# Altium PCB PCB1.PcbDoc
Units mm, origin at the board's own origin, x right, y up, seen from the top; angles counter-clockwise.
Board outline 98.3 x 83.95 mm, 2 copper layers (Top Layer, Bottom Layer); 52 components, 76 nets, 209 pads, 0 vias.
Unrouted connection lines stored in the file: 109.
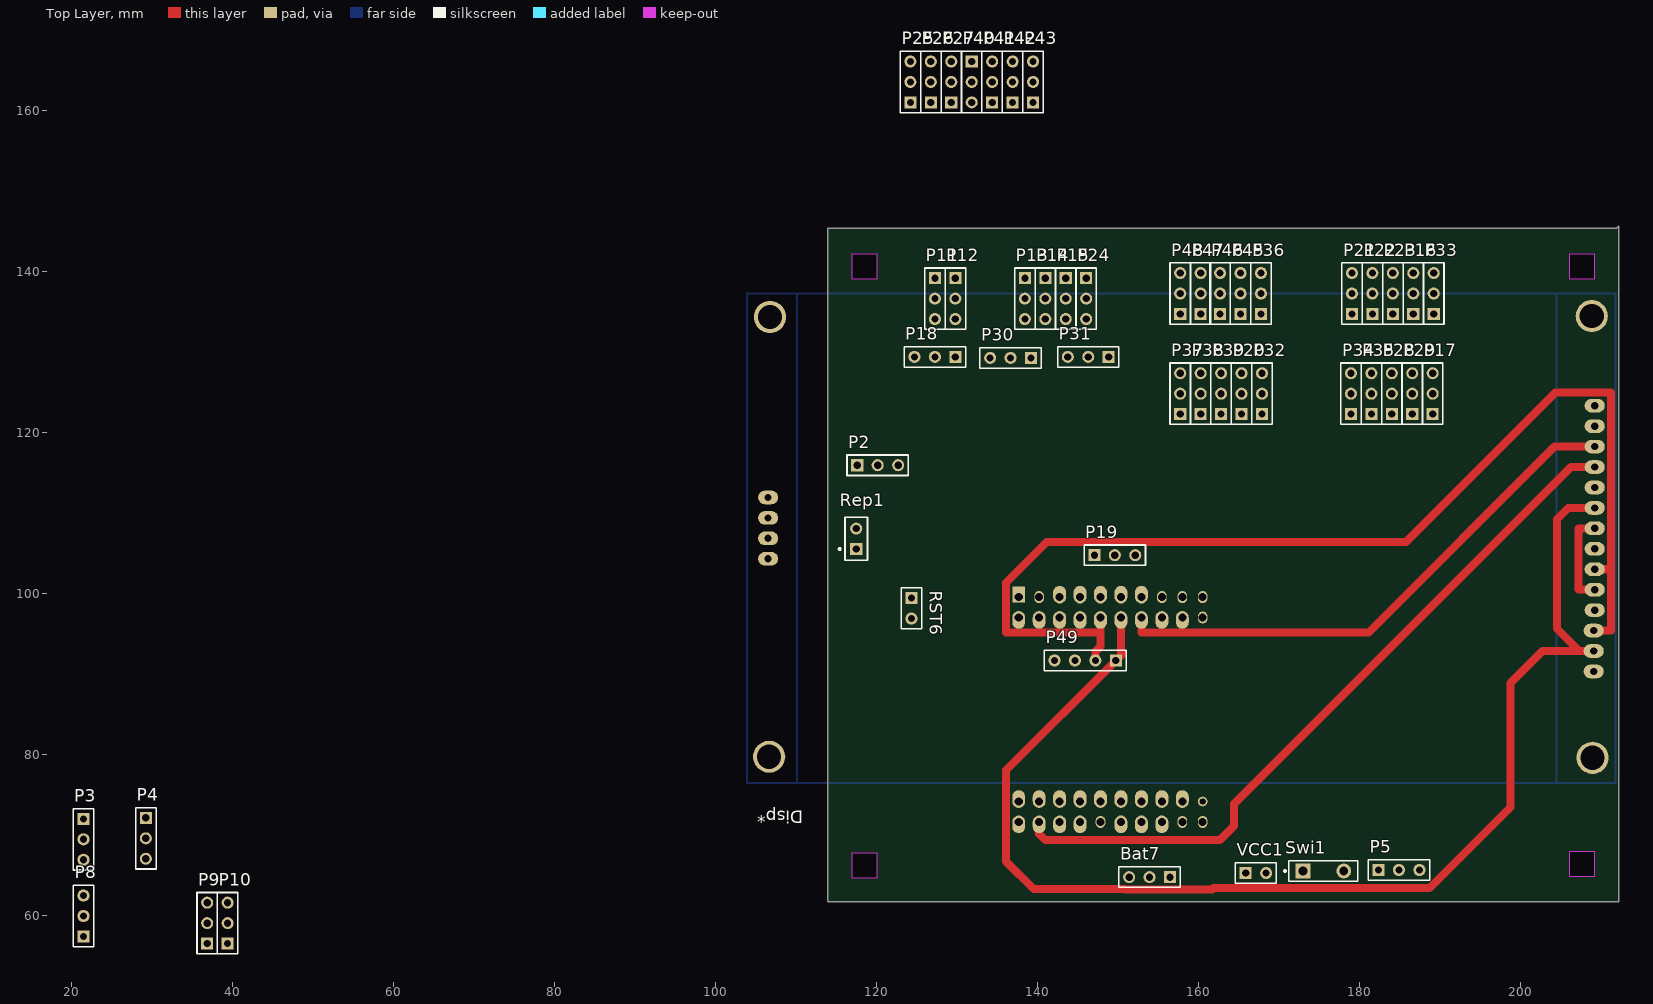
[diagram p0: Top Layer view]
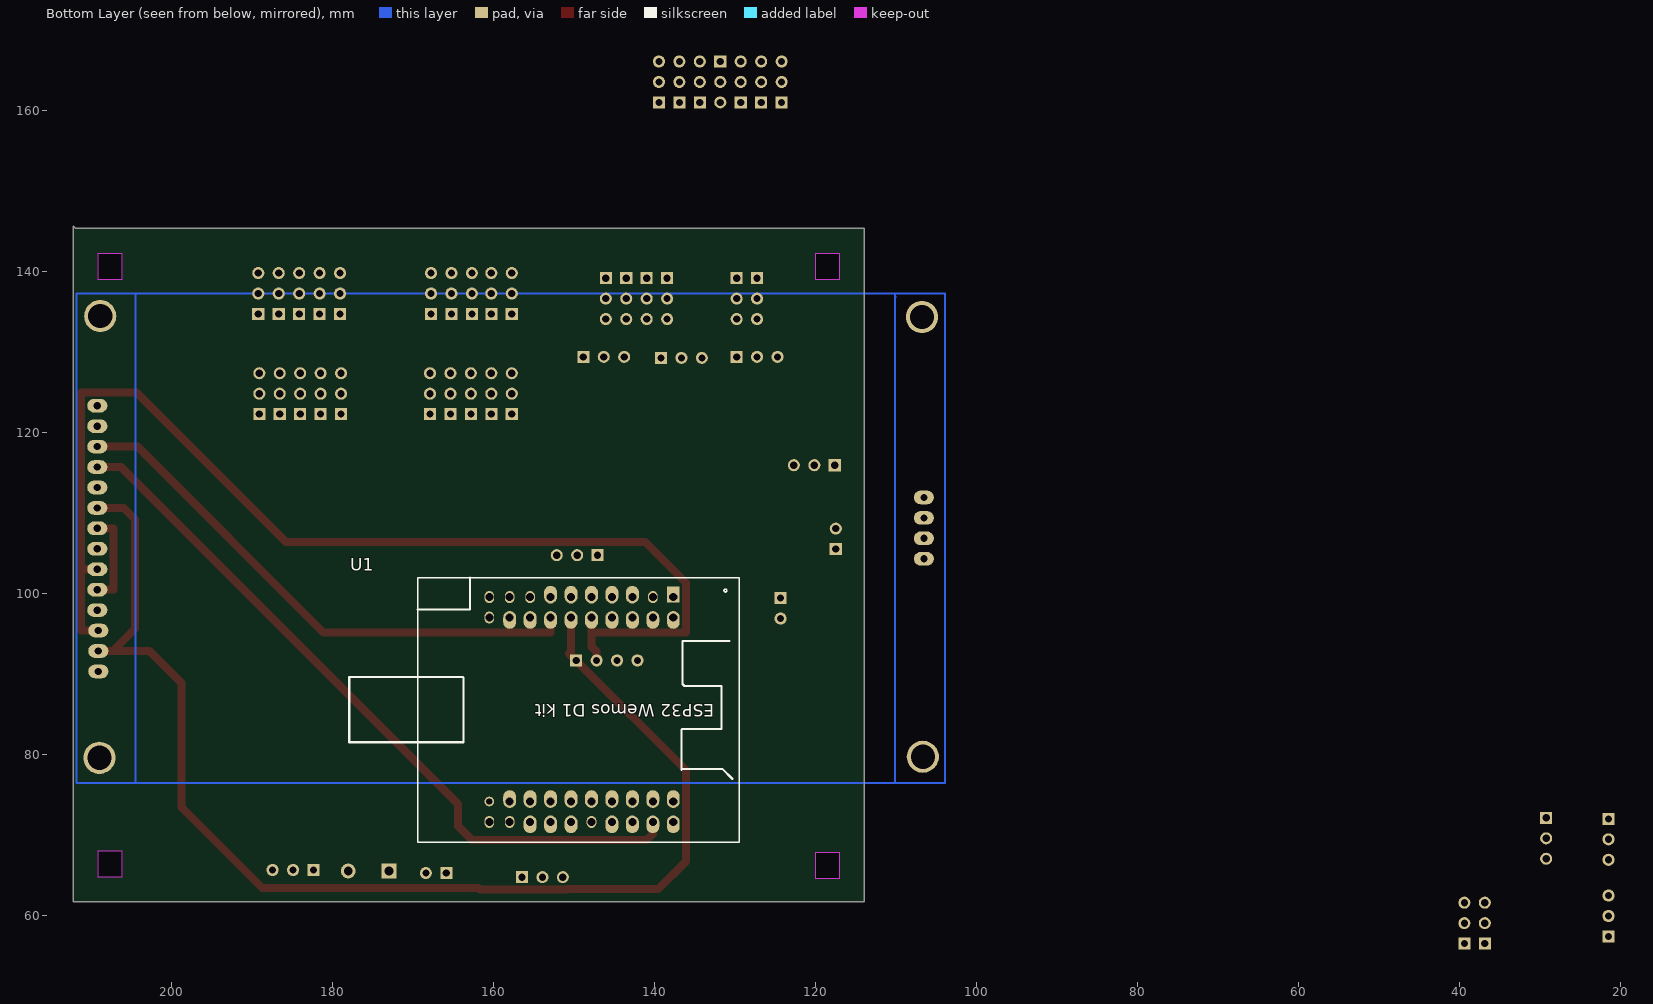
[diagram p1: Bottom Layer view, seen from below]

## Layer stack, top to bottom
Top Layer: signal copper 0.0356
Dielectric: dielectric 0.32, FR-4, Dk 4.8
Bottom Layer: signal copper 0.0356

## Board outline
113.919,61.722 113.919,145.415 211.963,145.415 212.217,145.669 212.217,61.722 113.919,61.722
cut-out: 206.121,64.834 206.121,68.008 209.169,68.008 209.169,64.834
cut-out: 206.121,139.065 206.121,142.24 209.169,142.24 209.169,139.065
cut-out: 116.967,139.065 116.967,142.24 120.015,142.24 120.015,139.065
cut-out: 119.761,-7.747 119.761,-4.572 122.809,-4.572 122.809,-7.747
cut-out: 116.967,-8.255 116.967,-5.08 120.015,-5.08 120.015,-8.255
cut-out: 116.967,64.643 116.967,67.818 120.015,67.818 120.015,64.643

## Design rules (kind name [scope] priority, off if disabled: settings)
Clearance [All] p1: gap=0.254
PolygonConnect [All] p1: connectstyle=Relief reliefconductorwidth=0.254 reliefentries=4 polygonreliefangle="90 Angle" airgapwidth=0.254
RoutingLayers [All] p1: top layer_v5=TRUE bottom layer_v5=FALSE
RoutingVias [All] p1: holewidth=0.9 width=2 viastyle="Through Hole" minholewidth=0.9 minwidth=2 maxholewidth=0.9 maxwidth=2
SolderMaskExpansion [All] p1: expansion=0.254
Width [All] p1: maxlimit=2 minlimit=0.5 preferedwidth=1
27 further rules are at their usual default settings.

## Components (designator, comment, footprint, x,y, rotation, side; value= is the part's Value field where it differs from the comment)
Bat7 "BatteryI" HDR1X3 156.464,64.77 r180 top
Disp* "LCD_TFT" "TCT_SPI_480x320 ST7796" 103.759,76.327 r0 top
P2 "Header 3" HDR1X3 117.602,115.951 r0 top
P3 "Header 3" HDR1X3 21.463,72.009 r270 top
P4 "Header 3" HDR1X3 29.21,72.136 r270 top
P5 "Header 3" HDR1X3 182.372,65.659 r0 top
P8 "Header 3" HDR1X3 21.463,57.404 r90 top
P9 "Header 3" HDR1X3 36.83,56.515 r90 top
P10 "Header 3" HDR1X3 39.37,56.515 r90 top
P11 "Header 3" HDR1X3 127.254,139.192 r270 top
P12 "Header 3" HDR1X3 129.794,139.192 r270 top
P13 "Header 3" HDR1X3 138.43,139.192 r270 top
P14 "Header 3" HDR1X3 140.97,139.192 r270 top
P15 "Header 3" HDR1X3 143.51,139.192 r270 top
P16 "Header 3" HDR1X3 186.69,134.747 r90 top
P17 "Header 3" HDR1X3 189.103,122.301 r90 top
P18 "Header 3" HDR1X3 129.794,129.413 r180 top
P19 "Header 3" HDR1X3 147.066,104.775 r0 top
P20 "Header 3" HDR1X3 165.354,122.301 r90 top
P21 "Header 3" HDR1X3 179.07,134.747 r90 top
P22 "Header 3" HDR1X3 181.61,134.747 r90 top
P23 "Header 3" HDR1X3 184.15,134.747 r90 top
P24 "Header 3" HDR1X3 146.05,139.192 r270 top
P25 "Header 3" HDR1X3 124.206,161.036 r90 top
P26 "Header 3" HDR1X3 126.746,161.036 r90 top
P27 "Header 3" HDR1X3 129.286,161.036 r90 top
P28 "Header 3" HDR1X3 184.023,122.301 r90 top
P29 "Header 3" HDR1X3 186.563,122.301 r90 top
P30 "Header 3" HDR1X3 139.192,129.286 r180 top
P31 "Header 3" HDR1X3 148.844,129.413 r180 top
P32 "Header 3" HDR1X3 167.894,122.301 r90 top
P33 "Header 3" HDR1X3 189.23,134.747 r90 top
P34 "Header 3" HDR1X3 178.943,122.301 r90 top
P35 "Header 3" HDR1X3 181.483,122.301 r90 top
P36 "Header 3" HDR1X3 167.767,134.747 r90 top
P37 "Header 3" HDR1X3 157.734,122.301 r90 top
P38 "Header 3" HDR1X3 160.274,122.301 r90 top
P39 "Header 3" HDR1X3 162.814,122.301 r90 top
P40 "Header 3" HDR1X3 131.826,166.116 r270 top
P41 "Header 3" HDR1X3 134.366,161.036 r90 top
P42 "Header 3" HDR1X3 136.906,161.036 r90 top
P43 "Header 3" HDR1X3 139.446,161.036 r90 top
P45 "Header 3" HDR1X3 165.227,134.747 r90 top
P46 "Header 3" HDR1X3 162.687,134.747 r90 top
P47 "Header 3" HDR1X3 160.274,134.747 r90 top
P48 "Header 3" HDR1X3 157.734,134.747 r90 top
P49 "Header 4" HDR1X4 149.733,91.694 r180 top
Rep1 "Speaker" PIN2 117.475,105.537 r90 top
RST6 "Header 2" HDR1X2 124.333,99.441 r270 top
Swi1 "SW-SPST" SPST-2 175.514,65.532 r0 top
U1 "ESP32 MiniKit" esp32 146.558,85.598 r270 bottom
VCC1 "VCC" HDR1X2 165.862,65.278 r0 top

## Footprints (in the part's own frame and the unit in brackets; to place one, negate y for a bottom-side part, rotate by r counter-clockwise, add the part's x,y. Pads: shape width x height; smd on the part's side, far side on the other; paste and mask are expansions set on the pad)
esp32 [mm]
  rect 2x1.61 hole 1 copper offset -0.3,0: 1(-13.97,8.89)
  oval 1.5x1.2 hole 1: 2(-13.97,6.35) 8(-13.97,-8.89) 9(-13.97,-11.43) 10(-13.97,-13.97) 20(-11.43,-13.97) 35(13.97,-1.27) 39(13.97,-11.43) 40(13.97,-13.97)
  oval 2.2x1.61 hole 1 copper offset -0.3,0: 3(-13.97,3.81) 4(-13.97,1.27) 5(-13.97,-1.27) 6(-13.97,-3.81) 7(-13.97,-6.35) 21(11.43,8.89) 22(11.43,6.35) 23(11.43,3.81) 24(11.43,1.27) 25(11.43,-1.27) 26(11.43,-3.81) 27(11.43,-6.35) 28(11.43,-8.89) 29(11.43,-11.43)
  oval 2.2x1.61 hole 1 copper offset 0.3,0: 11(-11.43,8.89) 12(-11.43,6.35) 13(-11.43,3.81) 14(-11.43,1.27) 15(-11.43,-1.27) 16(-11.43,-3.81) 17(-11.43,-6.35) 18(-11.43,-8.89) 19(-11.43,-11.43) 31(13.97,8.89) 32(13.97,6.35) 33(13.97,3.81) 34(13.97,1.27) 36(13.97,-3.81) 37(13.97,-6.35) 38(13.97,-8.89)
  round 1.2 hole 0.8: 30(11.43,-13.97)
  silkscreen extent -16.38,-31.37 16.51,17.1
HDR1X2 [mm] "Connector; Header; 2 Position"
  rect 1.5x1.5 hole 0.9: 1(0,0)
  round 1.5 hole 0.9: 2(2.54,0)
  silkscreen extent -1.27,-1.27 3.81,1.27
HDR1X3 [mm] "Connector; Header; 3 Position"
  rect 1.5x1.5 hole 0.9: 1(0,0)
  round 1.5 hole 0.9: 2(2.54,0) 3(5.08,0)
  silkscreen extent -1.27,-1.27 6.35,1.27
HDR1X4 [mm] "Connector; Header; 4 Position"
  rect 1.5x1.5 hole 0.9: 1(0,0)
  round 1.5 hole 0.9: 2(2.54,0) 3(5.08,0) 4(7.62,0)
  silkscreen extent -1.27,-1.27 8.89,1.27
PIN2 [mm] "Photosensitive Diode; 2 Leads"
  rect 1.5x1.5 hole 0.9: 1(0,0)
  round 1.5 hole 0.9: 2(2.54,0)
  silkscreen extent -1.4,-1.4 3.94,2.17
SPST-2 [mm] "Switch; 2 Leads"
  rect 1.85x1.85 hole 1.1: 1(-2.54,0)
  round 1.85 hole 1.1: 2(2.54,0)
  silkscreen extent -4.89,-1.27 4.28,1.27
"TCT_SPI_480x320 ST7796" [mm]
  round 4 hole 3: 0(2.9,3.4) 0(3,58.05) 0(105.11,58.15) 0(105.21,3.27)
  oval 2.5x1.7 hole 0.9: 1(105.35,14) 2(105.35,16.54) 3(105.35,19.08) 4(105.477,21.62) 5(105.477,24.16) 6(105.477,26.7) 7(105.477,29.24) 8(105.477,31.78) 9(105.477,34.32) 10(105.477,36.86) 11(105.477,39.4) 12(105.477,41.94) 13(105.477,44.48) 14(105.477,47.02) 15(2.77,28) 16(2.77,30.54) 17(2.77,33.08) 22(2.77,35.62)
  Bottom Layer region: 6.096,60.452 6.35,60.452 6.35,60.579 6.096,60.579
  Bottom Layer lines w0.254: 6.35,0.254 6.35,60.833 ; 100.711,0.254 100.711,60.96 ; 0.127,0.127 0.127,60.96 108.077,60.96 108.077,0.127 0.127,0.127

## Part data
Bat7: library part "Header 3", "Header, 3-Pin"
Disp*: library part 480x320_tft_SPI_LCD
P2 P3 P4 P5 P8 P9 P10 P11 P12 P13 P14 P15 P16 P17 P18 P19 P20 P21 P22 P23 P24 P25 P26 P27 P28 P29 P30 P31 P32 P33 P34 P35 P36 P37 P38 P39 P40 P41 P42 P43 P45 P46 P47 P48: "Header, 3-Pin"
P49: "Header, 4-Pin"
Rep1: "Loudspeaker"
RST6: "Header, 2-Pin"
Swi1: "Single-Pole, Single-Throw Switch"
U1: library part "ESP32 Wemos"
VCC1: library part "Header 2", "Header, 2-Pin"

## Nets (pads, with @x,y where several pads share a name; then routed paths per layer and width w, separated by ;. In a path a pad name is that pad's centre, name@x,y a point inside that pad or via, vN(x,y) a via of type N, cw(c..) or ccw(c..) an arc to the next point about the centre after c; other vN are vias at no path point)
CLK: Disp*.5 Disp*.8 P49.3 U1.14 | length 11.7
  Top Layer w1: Disp*.5 207.213,100.487 207.213,108.107 Disp*.8
GND: Disp*.13 P2.1 P2.2 P2.3 Rep1.1 RST6.1 U1.1 VCC1.1
I_14: P19.1 P19.2 P19.3 Rep1.2 U1.7
I_34: U1.6
I_35: U1.4
I_36: U1.12
I_39: U1.3
IO2_BOOT: U1.38
IO6: U1.40
IO7: U1.30
IO8: U1.39
IO9: U1.9
IO10: U1.20
IO11: U1.10
IO12: U1.35
IO13: U1.19
IO15: U1.29
IO16_CS_SD: U1.26
IO22: U1.23
IO26: P49.4 U1.13
IO32: U1.34
IO33: U1.5
IO_BOOT: U1.37
MISO: Disp*.3 Disp*.6 P49.2 U1.15 | length 142.2
  Top Layer w1: P49.2 147.193,92.812 147.828,93.447 147.828,95.174 ; U1.15 147.828,95.174 ; Disp*.3 211.252,95.407 211.252,103.027 ; Disp*.6 211.252,103.027 ; 147.828,95.174 136.093,95.174 136.093,101.346 141.148,106.401 185.801,106.401 204.368,124.968 211.252,124.968 211.252,103.027
MOSI: Disp*.2 Disp*.9 P49.1 U1.16 | length 155
  Top Layer w1: U1.16 150.368,92.812 150.609,92.57 P49.1 136.093,78.054 136.093,66.726 139.548,63.271 150.825,63.271 150.851,63.246 161.696,63.246 161.849,63.398 188.722,63.398 198.78,73.457 198.78,88.9 202.747,92.867 207.31,92.867 ; Disp*.2 207.31,92.867 ; Disp*.9 205.948,110.647 204.521,109.22 204.521,95.656 207.31,92.867
NetBat7_1: Bat7.1 Bat7.2 Bat7.3 U1.36
NetP3_1: P3.1 P3.2 P3.3
NetP4_1: P4.1 P4.2 P4.3
NetP8_1: P8.1 P8.2 P8.3
NetP9_1: P9.1 P9.2 P9.3
NetP10_1: P10.1 P10.2 P10.3
NetP11_1: P11.1 P11.2 P11.3
NetP12_1: P12.1 P12.2 P12.3
NetP13_1: P13.1 P13.2 P13.3
NetP14_1: P14.1 P14.2 P14.3
NetP15_1: P15.1 P15.2 P15.3
NetP16_1: P16.1 P16.2 P16.3
NetP17_1: P17.1 P17.2 P17.3
NetP18_1: P18.1 P18.2 P18.3
NetP20_1: P20.1 P20.2 P20.3
NetP21_1: P21.1 P21.2 P21.3
NetP22_1: P22.1 P22.2 P22.3
NetP23_1: P23.1 P23.2 P23.3
NetP24_1: P24.1 P24.2 P24.3
NetP25_1: P25.1 P25.2 P25.3
NetP26_1: P26.1 P26.2 P26.3
NetP27_1: P27.1 P27.2 P27.3
NetP28_1: P28.1 P28.2 P28.3
NetP29_1: P29.1 P29.2 P29.3
NetP30_1: P30.1 P30.2 P30.3
NetP31_1: P31.1 P31.2 P31.3
NetP32_1: P32.1 P32.2 P32.3
NetP33_1: P33.1 P33.2 P33.3
NetP34_1: P34.1 P34.2 P34.3
NetP35_1: P35.1 P35.2 P35.3
NetP36_1: P36.1 P36.2 P36.3
NetP37_1: P37.1 P37.2 P37.3
NetP38_1: P38.1 P38.2 P38.3
NetP39_1: P39.1 P39.2 P39.3
NetP40_1: P40.1 P40.2 P40.3
NetP41_1: P41.1 P41.2 P41.3
NetP42_1: P42.1 P42.2 P42.3
NetP43_1: P43.1 P43.2 P43.3
NetP45_1: P45.1 P45.2 P45.3
NetP46_1: P46.1 P46.2 P46.3
NetP47_1: P47.1 P47.2 P47.3
NetP48_1: P48.1 P48.2 P48.3
NetRST6_2: RST6.2 U1.11
NetSwi1_1: Swi1.1 VCC1.2
T_CS: Disp*.4 U1.25
TFT_BL: Disp*.7 U1.24
TFT_CS: Disp*.12 U1.17 | length 67.7
  Top Layer w1: U1.17 152.908,95.174 181.148,95.174 204.241,118.267 Disp*.12
TFT_DC: Disp*.10 U1.33
TFT_RST: Disp*.11 U1.32 | length 91.7
  Top Layer w1: U1.32 140.208,70.129 140.97,69.367 162.662,69.367 164.414,71.12 164.414,73.863 206.278,115.727 Disp*.11
VCC: Disp*.14 P5.1 P5.2 P5.3 Swi1.2 U1.18
VCC_5V: U1.28
pads on no net: Disp*.0 Disp*.1 Disp*.15 Disp*.16 Disp*.17 Disp*.22 U1.2 U1.8 U1.21 U1.22 U1.27 U1.31

## Text inside footprints (layer, text, board x,y; h text height)
U1: Bottom Overlay "ESP32 Wemos D1 kit" at 132.588,86.233 h1.52 r180